# Altium PCB Copy of HighSpeedADC2.PcbDoc
Units mil, origin at the board's own origin, x right, y up, seen from the top; angles counter-clockwise.
Board outline 1590 x 2280 mil, 2 copper layers (Top Layer, Bottom Layer); 23 components, 18 nets, 93 pads, 10 vias.
Unrouted connection lines stored in the file: 6.
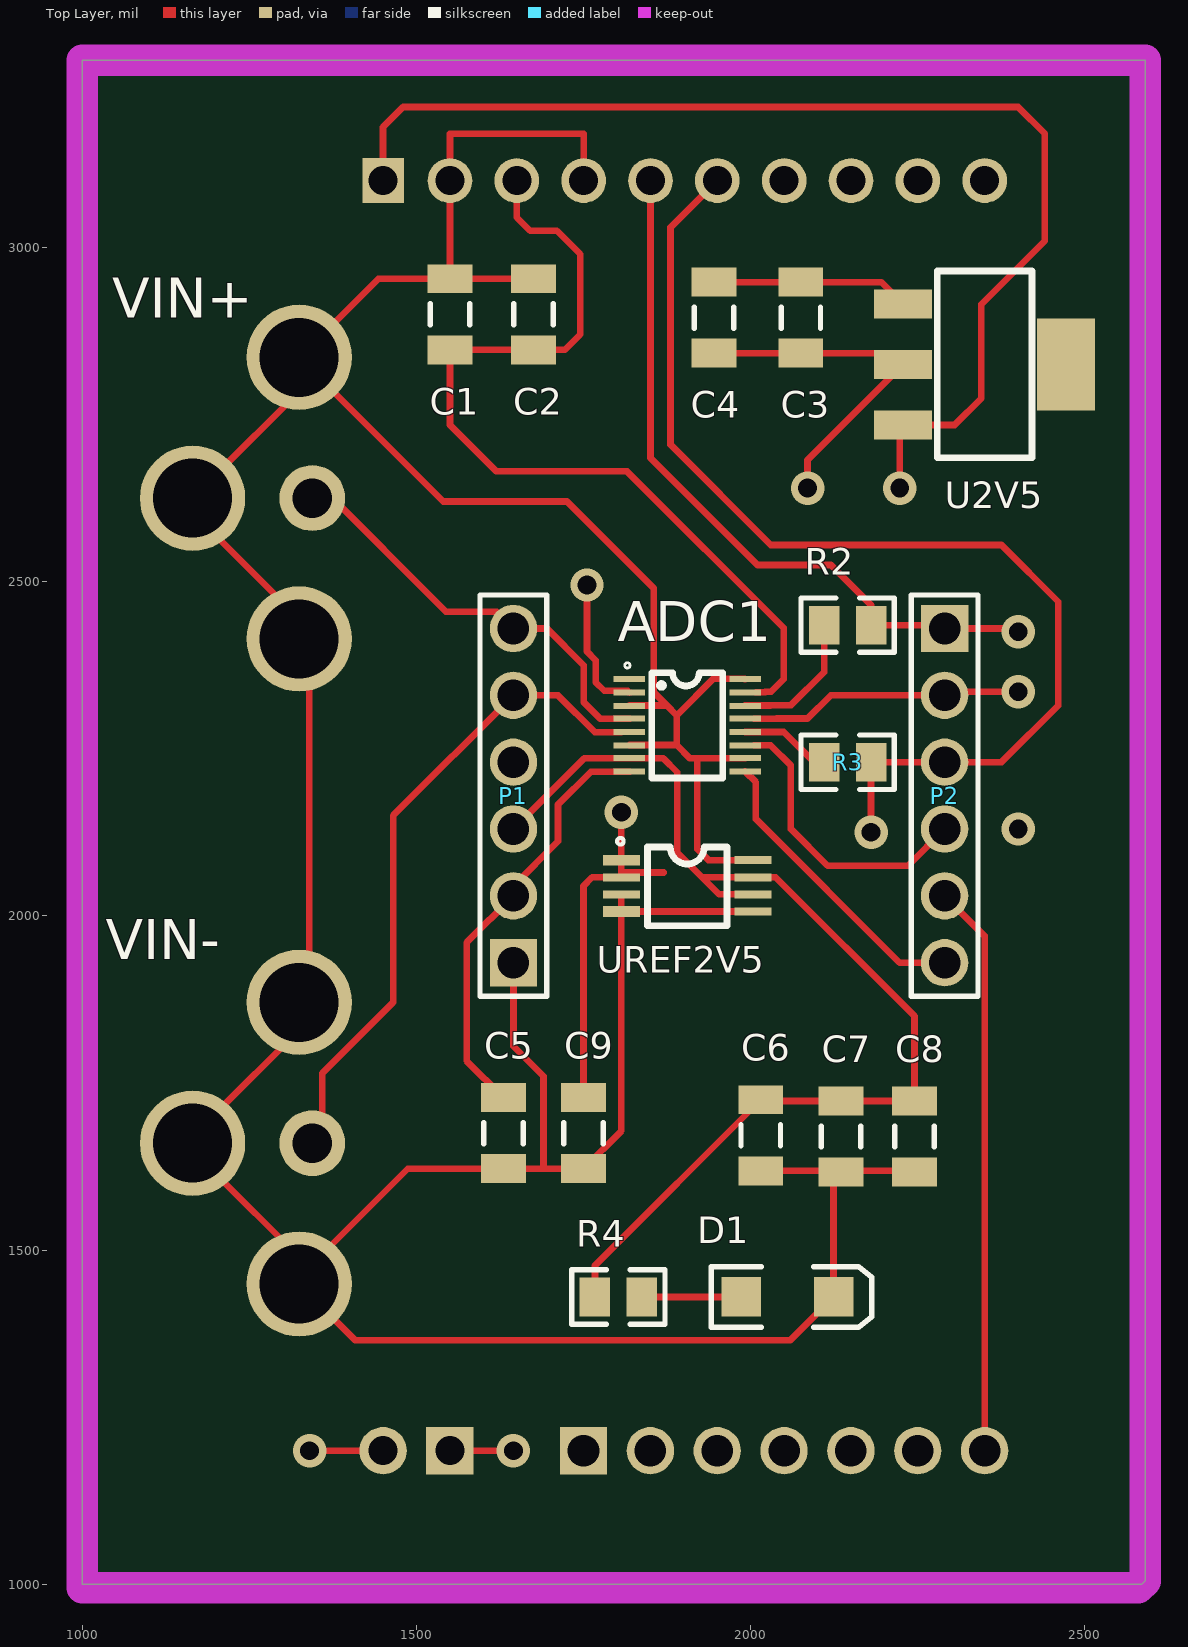
[diagram p0: Top Layer view]
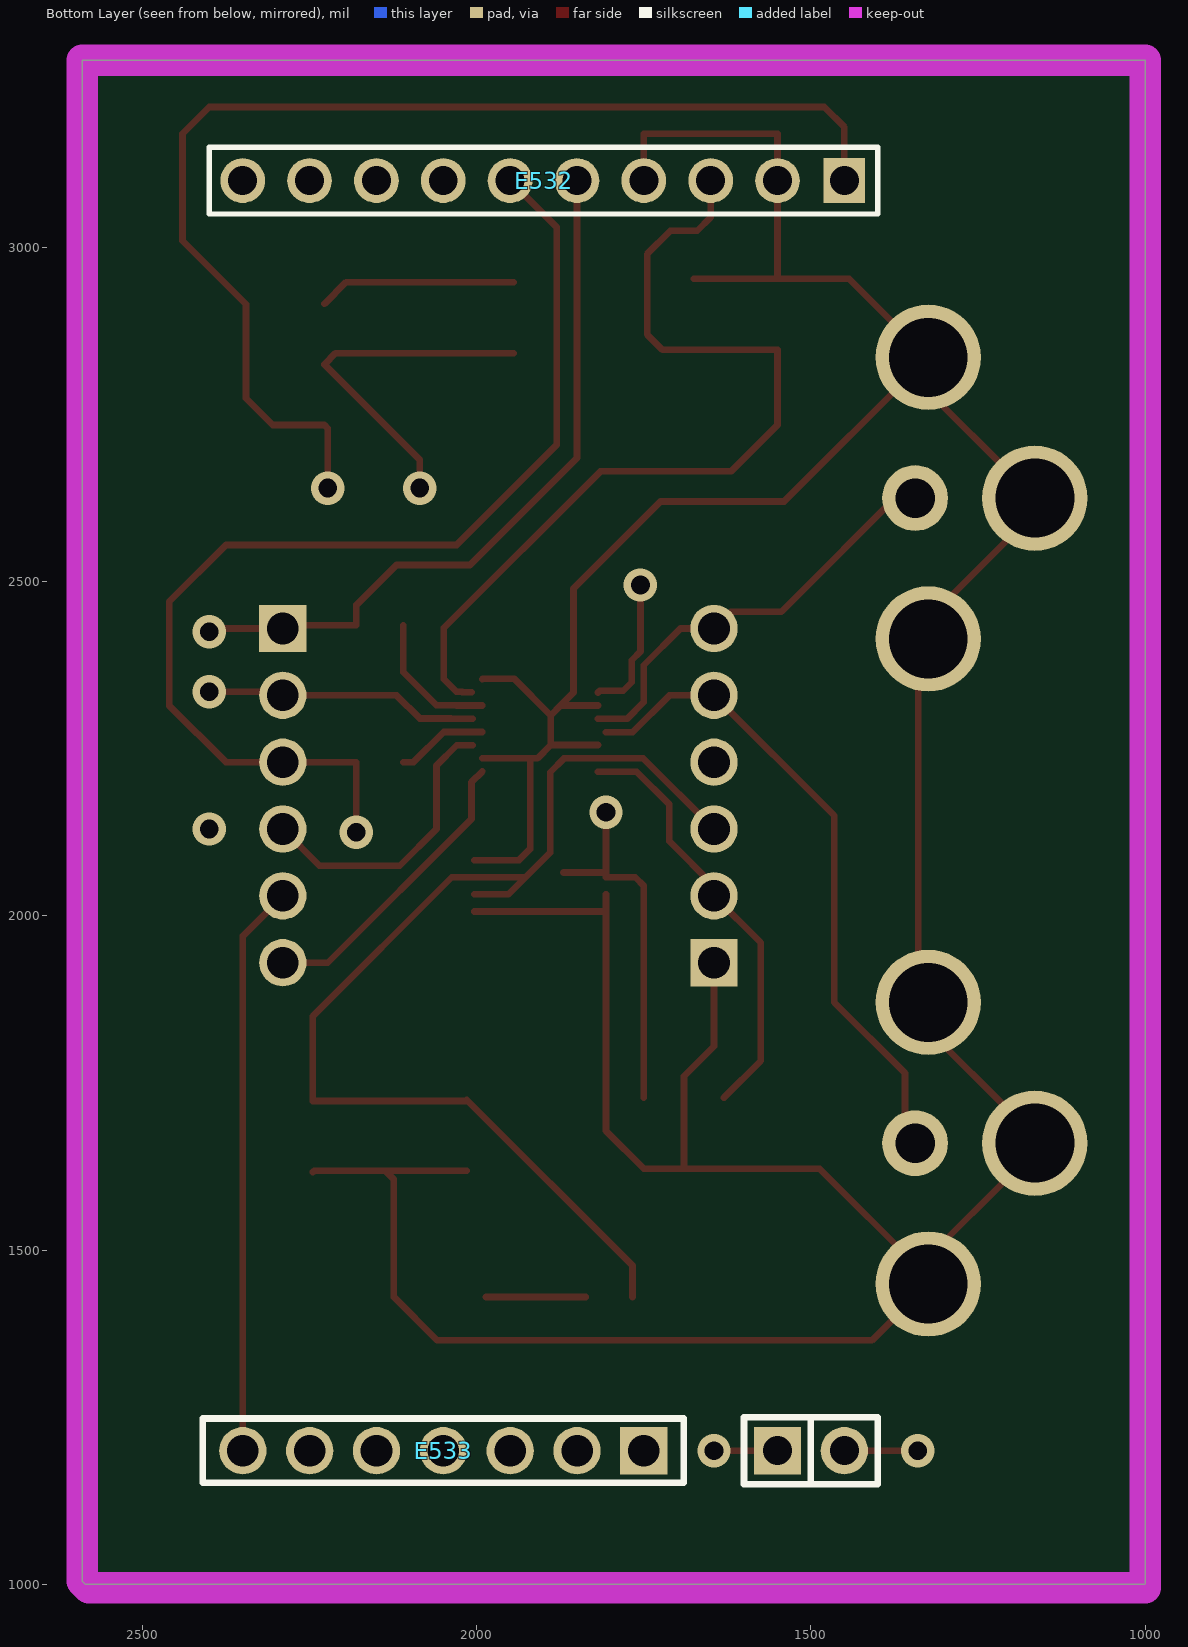
[diagram p1: Bottom Layer view, seen from below]

## Layer stack, top to bottom
Top Solder: solder mask 0.4, Solder Resist, Dk 3.5
Top Layer: signal copper 1.4
Dielectric 1: dielectric 12.6, FR-4, Dk 4.8
Bottom Layer: signal copper 1.4
Bottom Solder: solder mask 0.4, Solder Resist, Dk 3.5

## Board outline
1000,1000 2585,1000 2590,1005 2590,3280 1000,3280

## Design rules (kind name [scope] priority, off if disabled: settings)
Clearance [All] p1: gap=10 ignorepadtopadclearanceinfootprint=FALSE except(0: Arc-Hole Track-Hole SMDPad-Hole THPad-Hole Via-Hole Fill-Hole Poly-Hole Region-Hole Text-Hole; 8: Arc-Arc Arc-Track Arc-SMDPad Arc-THPad Arc-Via Arc-Fill Arc-Poly Arc-Region Track-Track Track-SMDPad Track-THPad Track-Via Track-Fill Track-Poly Track-Region Fill-Fill Fill-Poly Fill-Region Poly-Poly Poly-Region Region-Region)
PolygonConnect [All] p1: connectstyle=Relief reliefconductorwidth=10 reliefentries=4 polygonreliefangle="90 Angle" airgapwidth=10
RoomDefinition HiSpeedADC2 [InComponentClass('HiSpeedADC2')] p1: confinementstyle=ConfineIn formatcopy=TRUE lockcomponents=FALSE outline 1000,1000 2590,1000 2590,3275 1000,3275
RoutingVias [All] p1: holewidth=28 width=50 viastyle="Through Hole" minholewidth=28 minwidth=50 maxholewidth=28 maxwidth=50
SolderMaskExpansion [All] p1: expansion=4
Width [All] p1: maxlimit=10 minlimit=10 preferedwidth=10
30 further rules are at their usual default settings.

## Components (designator, comment, footprint, x,y, rotation, side; value= is the part's Value field where it differs from the comment)
ADC1 "LTC2380IMS-24#PBF" MSOP-16_L4.0-W3.0-P0.50-LS4.9-BL 1905,2290 r270 top
C1 "" C1206 1550,2900 r90 top value=10uF
C2 "" C1206 1675,2900 r90 top value=0.1uF
C3 "" C1206 2075,2895 r90 top value=10uF
C4 "" C1206 1945,2895 r90 top value=0.1uF
C5 "" C1206 1630,1675 r270 top value=0.1uF
C6 "" C1206 2015,1671.85 r270 top value=47uF
C7 "" C1206 2135,1670 r270 top value=2.2uF
C8 "" C1206 2245,1670 r270 top value=0.1uF
C9 "" C1206 1749.84,1675 r270 top value=0.1uF
D1 "LED2" 3.2X1.6X1.1 2055,1430 r0 top
E531 "A2541WV-2P" HDR-TH_P2.54-H-M_A2541WV-2P 1500,1200 r180 bottom locked
E532 "10P-2.54" HDR-TH_10P-P2.54-V 1900,3100 r0 bottom locked
E533 "A2541WV-7P" HDR-TH_7P-P2.54-V 2049.92,1200 r0 bottom locked
P1 "A2541WV-6P" HDR-TH_6P-P2.54-V 1645,2180 r90 top
P2 "A2541WV-6P" HDR-TH_6P-P2.54-V 2290,2180 r270 top
R2 "33" 0805_R 2144.96,2435 r0 top
R3 "0" 0805_R 2144.96,2230 r0 top
R4 "1k" 0805_R 1802.01,1430 r0 top
U2V5 "AMS1117-2.5v" SOT-223_L6.7-W3.5-P2.30-BR 2349.84,2825 r180 top
UREF2V5 "LTC6655MS8-2.5" MSOP-8_L3.0-W3.0-P0.65-LS4.9-BL 1905,2045 r270 top
VIN+ "BNC1" BNC-TH_DOSIN-801-0072 1165,2625 r90 top locked
VIN- "BNC" BNC-TH_DOSIN-801-0072 1165,1660 r90 top locked

## Footprints (in the part's own frame and the unit in brackets; to place one, negate y for a bottom-side part, rotate by r counter-clockwise, add the part's x,y. Pads: shape width x height; smd on the part's side, far side on the other; paste and mask are expansions set on the pad)
3.2X1.6X1.1 [mm] "SMT LED; 2 Flat Leads"
  rect 1.5x1.5 smd: 1(-1.75,0) 2(1.75,0)
  silkscreen extent -2.9,-1.15 3.2,1.15
0805_R [mm]
  rect 1.16x1.47 smd: 1(-0.89,0) 2(0.89,0)
  silkscreen extent -1.77,-1.04 1.77,1.03, body extent -1,-0.62 1,0.63, height 0.49
BNC-TH_DOSIN-801-0072 [mm]
  round 2.5 hole 1.5: 1(0,-4.55)
  round 4 hole 3: 2(5.35,-4.05) 3(-5.35,-4.05) 4(0,0)
C1206 [mm] "Chip Capacitor, Body 3.2x1.6mm, IPC High Density"
  rect 1.1x1.7 smd: 1(-1.35,0) 2(1.35,0)
  silkscreen extent -0.4,-0.75 0.4,0.75, body extent -1.7,-0.9 1.7,0.9, height 1.3
HDR-TH_6P-P2.54-V [mm]
  rect 1.8x1.8 hole 1.2: 1(-6.35,0)
  round 1.8 hole 1.2: 2(-3.81,0) 3(-1.27,0) 4(1.27,0) 5(3.81,0) 6(6.35,0)
  silkscreen extent -7.62,-1.27 7.62,1.27
HDR-TH_7P-P2.54-V [mm]
  rect 1.8x1.8 hole 1.2: 1(-7.622,0)
  round 1.8 hole 1.2: 2(-5.082,0) 3(-2.542,0) 4(-0.002,0) 5(2.538,0) 6(5.078,0) 7(7.618,0)
  silkscreen extent -9.14,-1.22 9.14,1.22
HDR-TH_10P-P2.54-V [mm]
  rect 1.575x1.7 hole 1.1: 1(-11.43,0)
  round 1.7 hole 1.1: 2(-8.89,0) 3(-6.35,0) 4(-3.81,0) 5(-1.27,0) 6(1.27,0) 7(3.81,0) 8(6.35,0) 9(8.89,0) 10(11.43,0)
  silkscreen extent -12.7,-1.27 12.7,1.27
HDR-TH_P2.54-H-M_A2541WV-2P [mm]
  rect 1.8x1.8 hole 1.1: 1(-1.27,0)
  round 1.8 hole 1.1: 2(1.27,0)
  silkscreen extent -2.54,-1.27 2.54,1.27
MSOP-8_L3.0-W3.0-P0.65-LS4.9-BL [mil]
  rect 16x55 smd: 1(-38.39,-98.5) 4(38.39,-98.5)
  rect 12x55 smd: 2(-12.8,-98.5) 3(12.8,-98.5) 5(38.39,98.5) 6(12.8,98.5) 7(-12.8,98.5) 8(-38.39,98.5)
  silkscreen extent -72,-105 60,60
MSOP-16_L4.0-W3.0-P0.50-LS4.9-BL [mil]
  rect 9x47.24 smd: 1(-64.25,-86.5) 2(-44.25,-86.5) 3(-24.25,-86.5) 4(-5.25,-86.5) 5(14.75,-86.5) 6(34.75,-86.5) 7(53.75,-86.5) 8(73.75,-86.5) 9(73.75,86.5) 10(53.75,86.5) 11(34.75,86.5) 12(14.75,86.5) 13(-5.25,86.5) 14(-24.25,86.5) 15(-44.25,86.5) 16(-64.25,86.5)
  silkscreen extent -89,-93 84,53
SOT-223_L6.7-W3.5-P2.30-BR [mm]
  rect 2.2x1.1 smd: 1(3.099,-2.3) 2(3.099,0) 3(3.099,2.3)
  rect 2.2x3.5 smd: 4(-3.099,0)
  silkscreen extent -1.8,-3.55 1.8,3.55

## Part data
C1 C2 C3 C4 C5 C6 C7 C8 C9: library part "Cap Semi", "Capacitor (Semiconductor SIM Model)", LatestRevisionDate=29-May-2009, LatestRevisionNote="IPC-7351 Footprint Added.", PackageDescription="Chip Capacitor", PackageReference=C1206, Published=8-Jun-2000, Publisher="Altium Limited"
D1: "Typical RED, GREEN, YELLOW, AMBER GaAs LED", LatestRevisionDate=17-Jul-2002, LatestRevisionNote="Re-released for DXP Platform.", PackageDescription="SM LED; 2 Flat Leads", PackageReference=3.2X1.6X1.1, PackageVersion=Feb-2002, Published=8-Jun-2000, Publisher="Altium Limited"
R2 R3 R4: library part Res_0805, "0805贴片电阻", Package=0805, SuppliersPartNumber=C26113, ComponentLink1Description=供应商链接, ComponentLink1URL=http://www.szlcsc.com/product/details_26856.html, Supplier=LC
U2V5: library part AMS1117-ADJ, BOM_JLCPCB SMD=Yes, BOM_Manufacturer=AMS, BOM_Manufacturer Part=AMS1117-ADJ, BOM_Supplier=LCSC, BOM_Supplier Part=C6188, Contributor=GerryChen, image=//image.lceda.cn/szlcsc/C6188.jpg, SMT Type=Extend, sourceId=0btnFXRxP, spicePre=U, spiceSymbolName=AMS1117-ADJ
UREF2V5: library part LTC6655MS8-5
VIN+: library part BNC

## Via types
v1: diameter 50, hole 28, Top Layer to Bottom Layer, 10 vias

## Nets (pads, with @x,y where several pads share a name; then routed paths per layer and width w, separated by ;. In a path a pad name is that pad's centre, name@x,y a point inside that pad or via, vN(x,y) a via of type N, cw(c..) or ccw(c..) an arc to the next point about the centre after c; other vN are vias at no path point)
CLK_IN: E533.7 P2.5 | length 854.8
  Top Layer w10: P2.5 2349.84,1970.16 E533.7
D2V5: ADC1.2 C3.1 C4.1 U2V5.2 | length 741.7
  Top Layer w10: v1(1755,2495) 1755,2395.46 1768,2382.46 1768,2349.56 1780.81,2336.75 1816,2336.75 ADC1.2 ; C4.1 C3.1 2210.99,2841.85 U2V5.2 2085,2682.16 v1(2085,2640)
D3V3: ADC1.15 C1.1 C2.1 E532.3 | length 1368.1
  Top Layer w10: E532.3@1655,3095 E532.3 1650,3045 1670,3025 1710,3025 1745,2990 1745,2870 1721.85,2846.85 C2.1 C1.1 1550,2734.45 1619.45,2665 1815,2665 2049.34,2430.66 2049.34,2354.34 2030.25,2335.25 2021.83,2335.25 2021.33,2334.75 ADC1.15@2007.69,2334.75
D5V0: C9.1 E532.1 U2V5.3 UREF2V5.1 UREF2V5.2 | length 2303.6
  Top Layer w10: E532.1 1450,3180 1480,3210 2400,3210 2440,3170 2440,3010 2345,2915 2345,2774.45 2305,2734.45 U2V5.3 2222.8,2729.4 v1(2222.8,2640) ; C9.1 1749.84,2044.84 1762.8,2057.8 UREF2V5.2 1806.5,2065 ; v1(1806.5,2155) UREF2V5.1 1806.5,2065 ; 1870,2065 1806.5,2065
GND: ADC1.3 ADC1.6 ADC1.10 ADC1.16 C1.2 C2.2 C3.2 C4.2 C5.2 C6.2 C7.2 C8.2 C9.2 D1.2 E532.2 E532.4 P1.1 U2V5.1 UREF2V5.3 UREF2V5.4 UREF2V5.5 UREF2V5.8 VIN+.2 VIN+.3 VIN+.4 VIN-.2 VIN-.3 VIN-.4 | length 7025.2
  Top Layer w10: VIN-.3 1408.81,1365 2058.9,1365 D1.2 2123.9,1605.75 C7.2 ; VIN+.2 VIN+.2@1339.44,2820.63 ; P1.1 1645,1805 1689.92,1760.08 1689.92,1621.85 ; C2.2 C1.2 ; E532.4 1750,3170 1550,3170 E532.2 C1.2 ; UREF2V5.3 UREF2V5.4 ; ADC1.6@1818.5,2255.75 1889.25,2255.75 ; ADC1.3@1818.5,2314.75 1874.5,2314.75 ; C4.2 C3.2 2195.24,2948.15 U2V5.1 ; ADC1.10@1991.5,2235.75 1920,2235.75 ; ADC1.16 1990.75,2355 1944.25,2355 1889.25,2300 ; UREF2V5.5 UREF2V5.4 ; UREF2V5.8 1936.61,2083.39 1920,2100 1920,2235.75 ; C6.2 2243.15,1618.7 C8.2 ; VIN+.2@1339.44,2820.63 1339.44,2850.63 1340.63,2850.63 1443.15,2953.15 C1.2 ; VIN+.2@1339.44,2820.63 1339.44,2799.44 1180,2640 1180,2588.81 1339.44,2429.37 1339.44,1844.44 1180,1685 1180,1633.81 1339.44,1474.37 1486.92,1621.85 C5.2 1689.92,1621.85 ; VIN+.2@1339.44,2820.63 1540.07,2620 1725,2620 1855.12,2489.88 1855.12,2334.13 1874.5,2314.75 ; 1689.92,1621.85 C9.2 1806.5,1678.51 UREF2V5.4 ; 1874.5,2314.75 1889.25,2300 ; 1889.25,2255.75 1889.25,2300 ; 1889.25,2255.75 1909.25,2235.75 1920,2235.75
MISO: E532.5 P2.1 R2.2 | length 1090.3
  Top Layer w10: E532.5 1850,2685 2010,2525 2120,2525 2180,2465 R2.2 2285,2435 P2.1 2395,2430 v1(2400,2425)
MOSI: E532.6 P2.3 R3.2 | length 1676.7
  Top Layer w10: E532.6 1880,3030 1880,2705 2030,2555 2375,2555 2460,2470 2460,2314.75 2375.25,2230 P2.3 R3.2 v1(2180,2125)
NetADC1_1: ADC1.1
NetADC1_9: ADC1.9 P2.6 | length 449.3
  Top Layer w10: ADC1.9 2007.69,2200.06 2007.69,2145.1 2222.8,1930 P2.6
NetADC1_12: ADC1.12 R3.1 | length 137.2
  Top Layer w10: ADC1.12 2049.34,2275.25 2094.59,2230 R3.1
NetADC1_14: ADC1.14 R2.1 | length 209.4
  Top Layer w10: ADC1.14@1991.5,2314.75 2029.62,2314.75 2030.12,2315.25 2060.5,2315.25 2109.92,2364.67 R2.1
NetD1_1: D1.1 R4.2 | length 149.1
  Top Layer w10: R4.2 D1.1
NSS: ADC1.11 E531.1 P2.4 | length 532.5
  Top Layer w10: E531.1 v1(1645,1200) ; ADC1.11@2005.64,2255.25 2029.75,2255.25 2060,2225 2060,2130 2115,2075 2235,2075 P2.4
  other v1: 2400,2130
SCK: ADC1.13 E531.2 P2.2 | length 521.1
  Top Layer w10: v1(1340,1200) E531.2 ; ADC1.13@2005.64,2294.75 2037.9,2294.75 2038.4,2295.25 2085,2295.25 2119.75,2330 P2.2 2295.25,2335.25 v1(2400,2335.25)
VINN: ADC1.5 P1.5 VIN-.1 | length 947.8
  Top Layer w10: VIN-.1@1359.13,1685 1359.13,1764.77 1465,1870.63 1465,2150 P1.5 1711.72,2330 1766.97,2274.75 ADC1.5@1806.5,2274.75
VINP: ADC1.4 P1.6 VIN+.1 | length 634.6
  Top Layer w10: VIN+.1@1359.13,2640 1544.14,2455 1620,2455 P1.6 1695,2430 1750,2375 1750,2320 1775.25,2294.75 ADC1.4@1818.5,2294.75
VREF2V5: ADC1.7 C6.1 C7.1 C8.1 P1.3 R4.1 UREF2V5.6 UREF2V5.7 | length 1716.1
  Top Layer w10: P1.3 1750.75,2235.75 1869.25,2235.75 1890,2215 1890,2095 1927.2,2057.8 ; R4.1 1766.97,1476.97 C6.1 2016.85,1723.15 C7.1 C8.1 2245,1850 2037.2,2057.8 UREF2V5.7 1927.2,2057.8 ; UREF2V5.6 1952.8,2032.2 1927.2,2057.8
VREF/DGC: ADC1.8 C5.1 P1.2 | length 645.1
  Top Layer w10: C5.1 1575,1783.15 1575,1960 P1.2 1645,2045 1711.72,2111.72 1711.72,2166.72 1760.75,2215.75 ADC1.8@1818.5,2215.75
pads on no net: E532.7 E532.8 E532.9 E532.10 E533.1 E533.2 E533.3 E533.4 E533.5 E533.6 P1.4 U2V5.4

## Keep-outs
Keep-Out Layer:
  lines w47.24: 1000,995 1000,3280 2590,3280 2590,1005 2580,995 1000,995